# Altium PCB wisp-6-PIFA.PcbDoc
Units mil, origin at the board's own origin, x right, y up, seen from the top; angles counter-clockwise.
Board outline 2036 x 1605 mil, 4 copper layers (Top Layer, Mid-Layer 1, Mid-Layer 2, Bottom Layer); 66 components, 63 nets, 258 pads, 67 vias.
Unrouted connection lines stored in the file: 2.
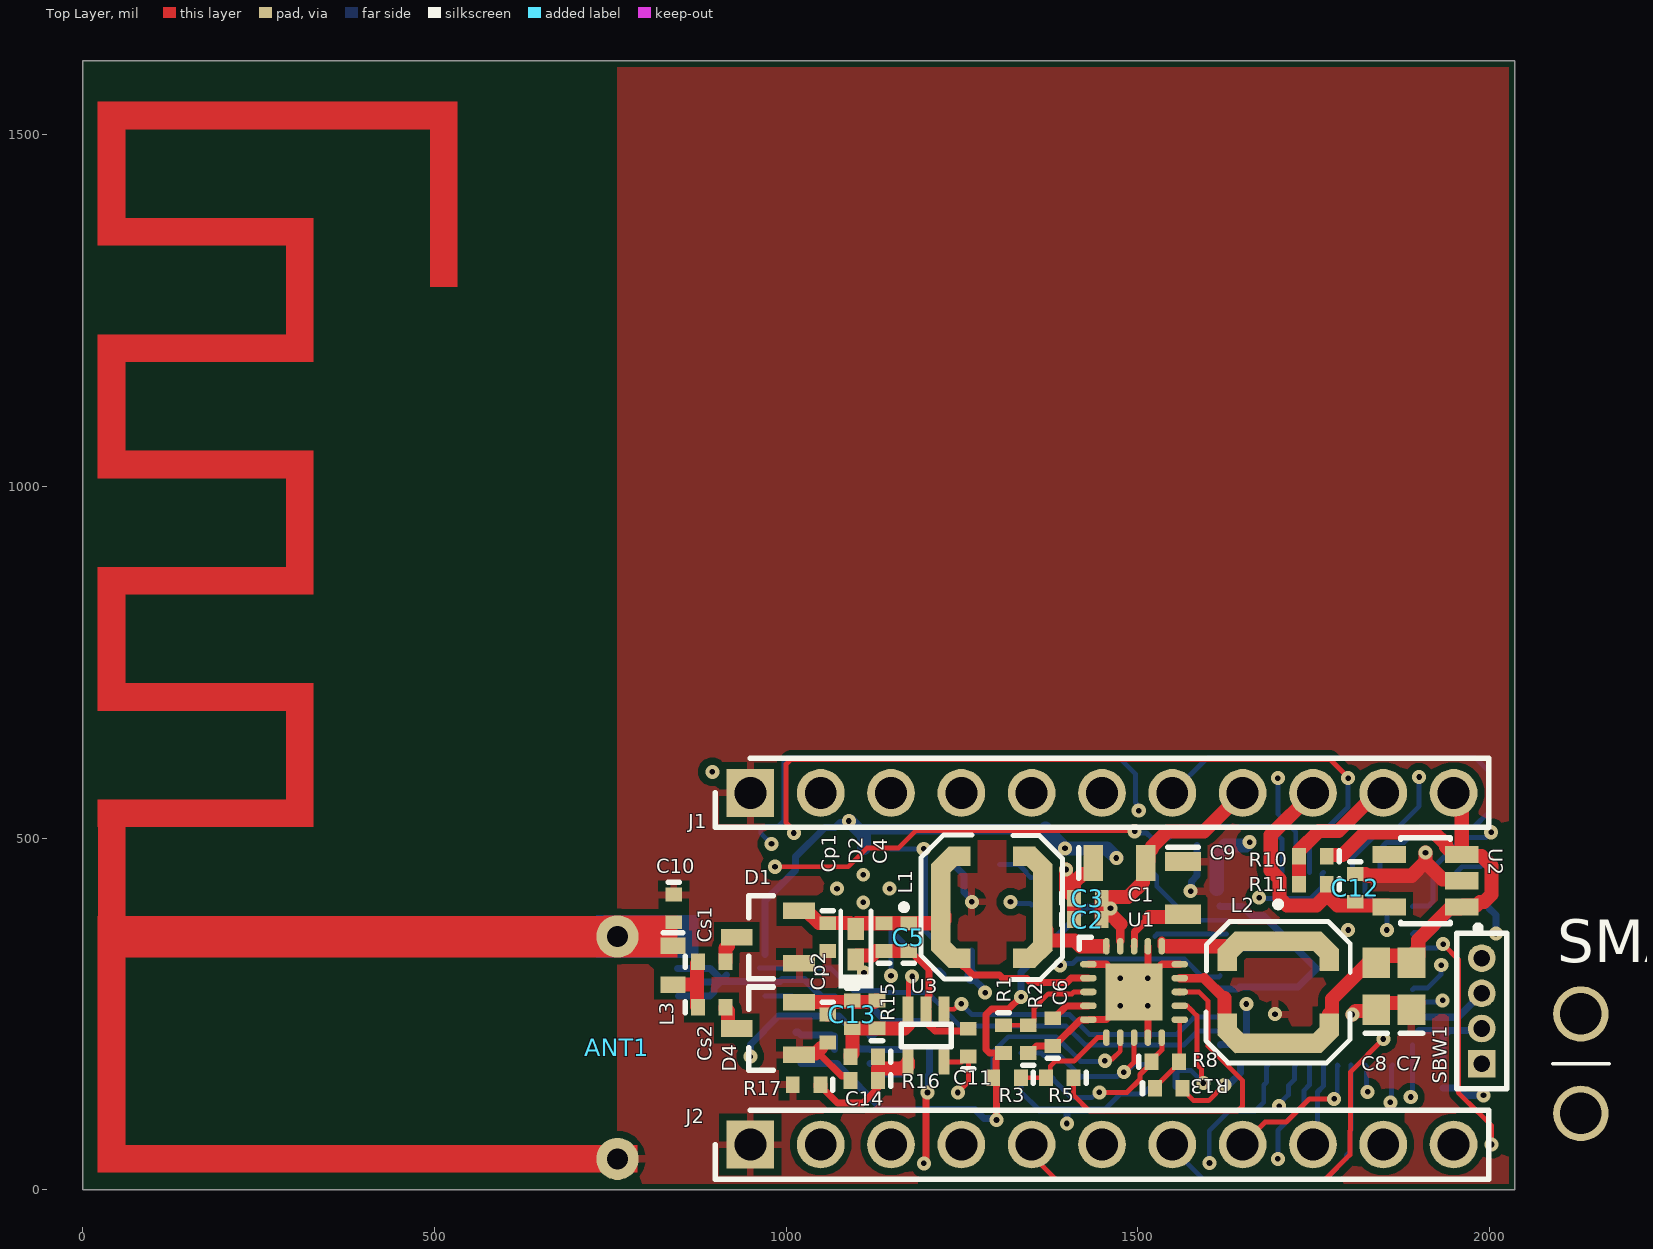
[diagram p0: Top Layer view]
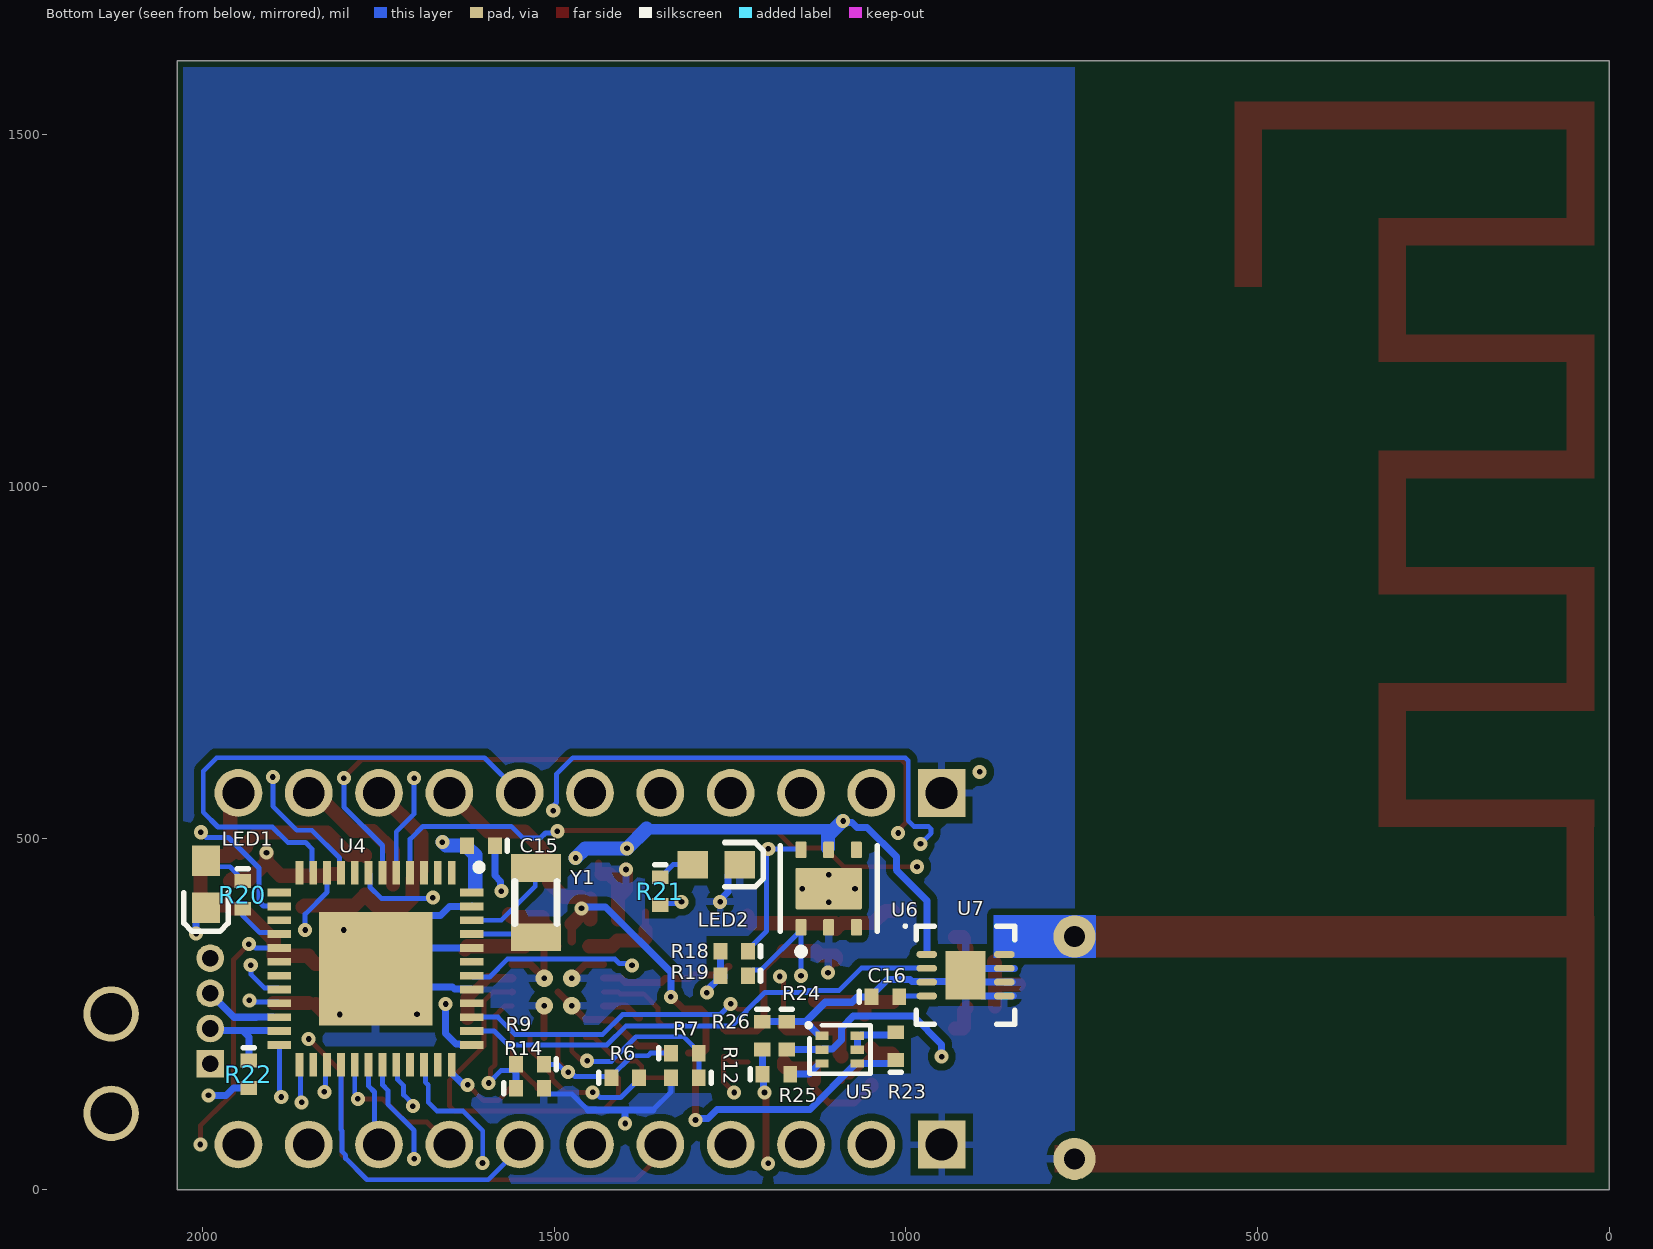
[diagram p1: Bottom Layer view, seen from below]
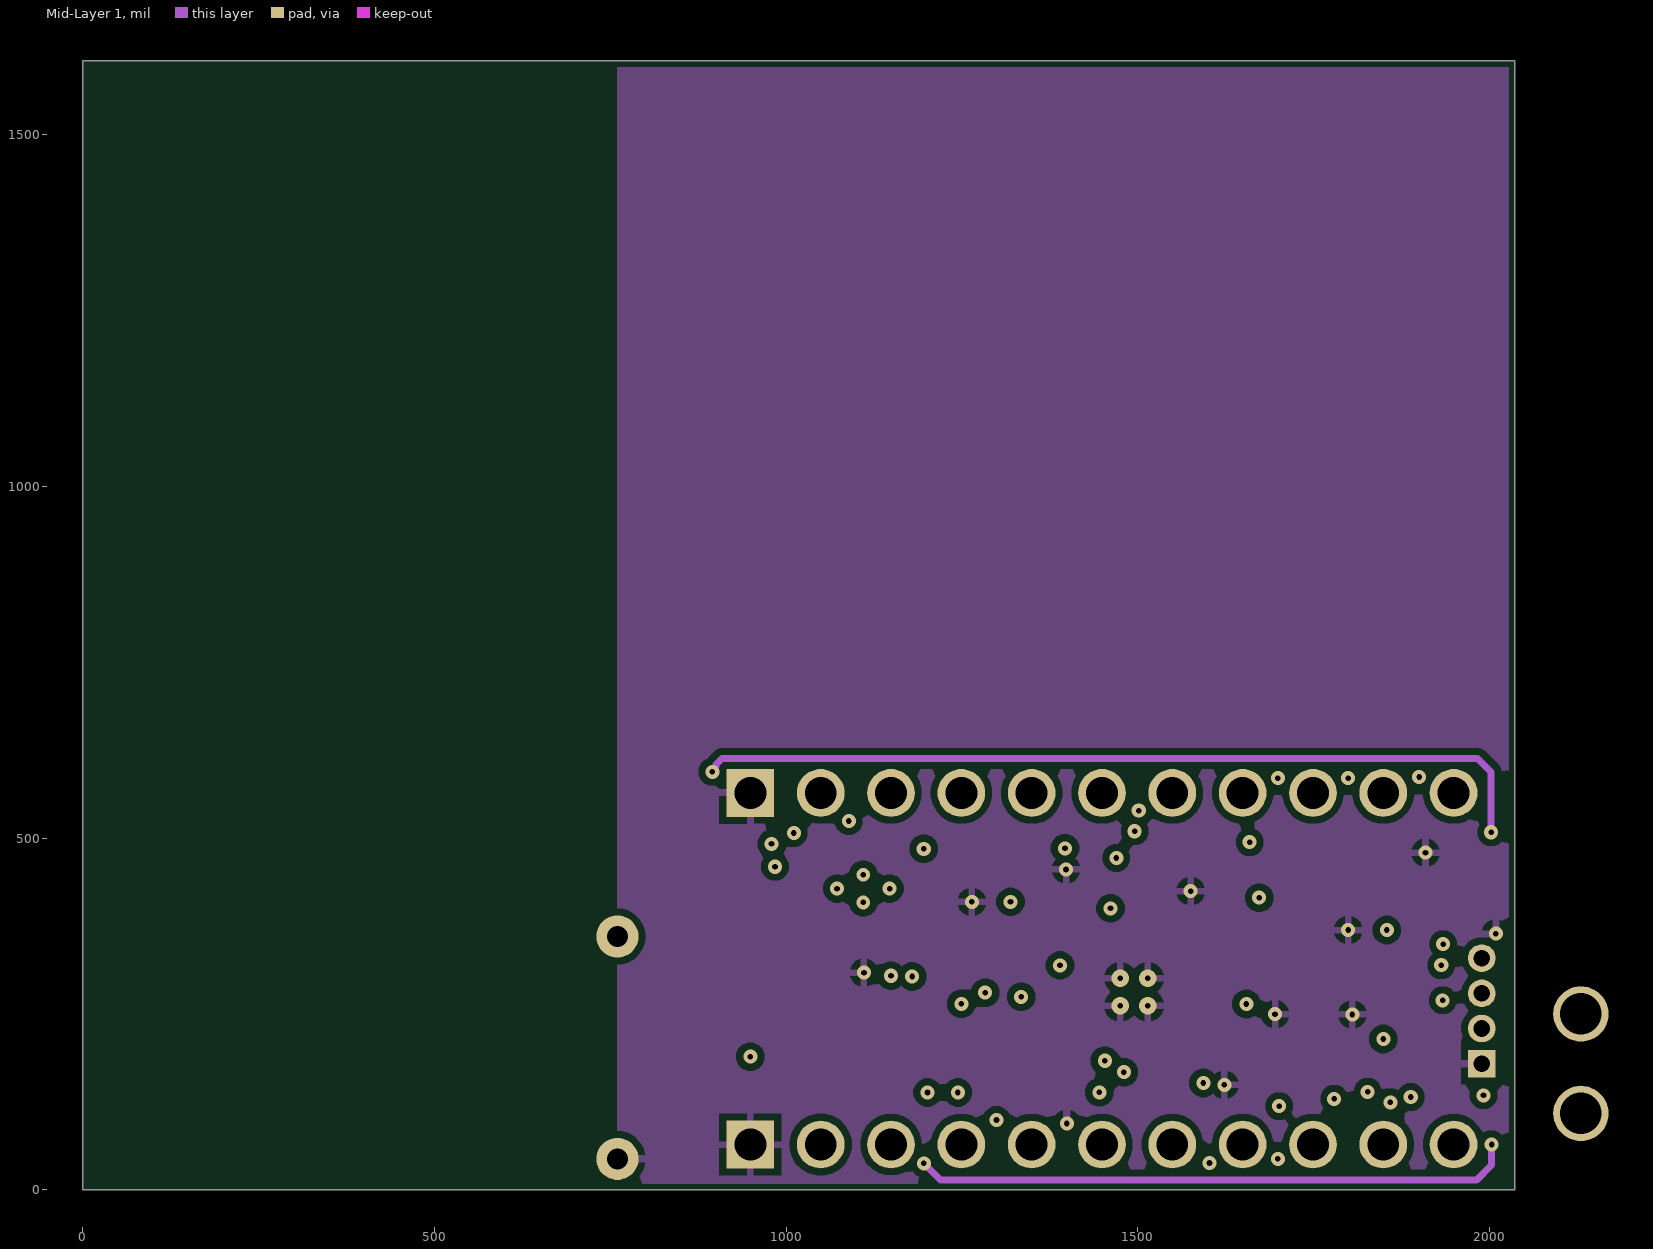
[diagram p2: Mid-Layer 1]
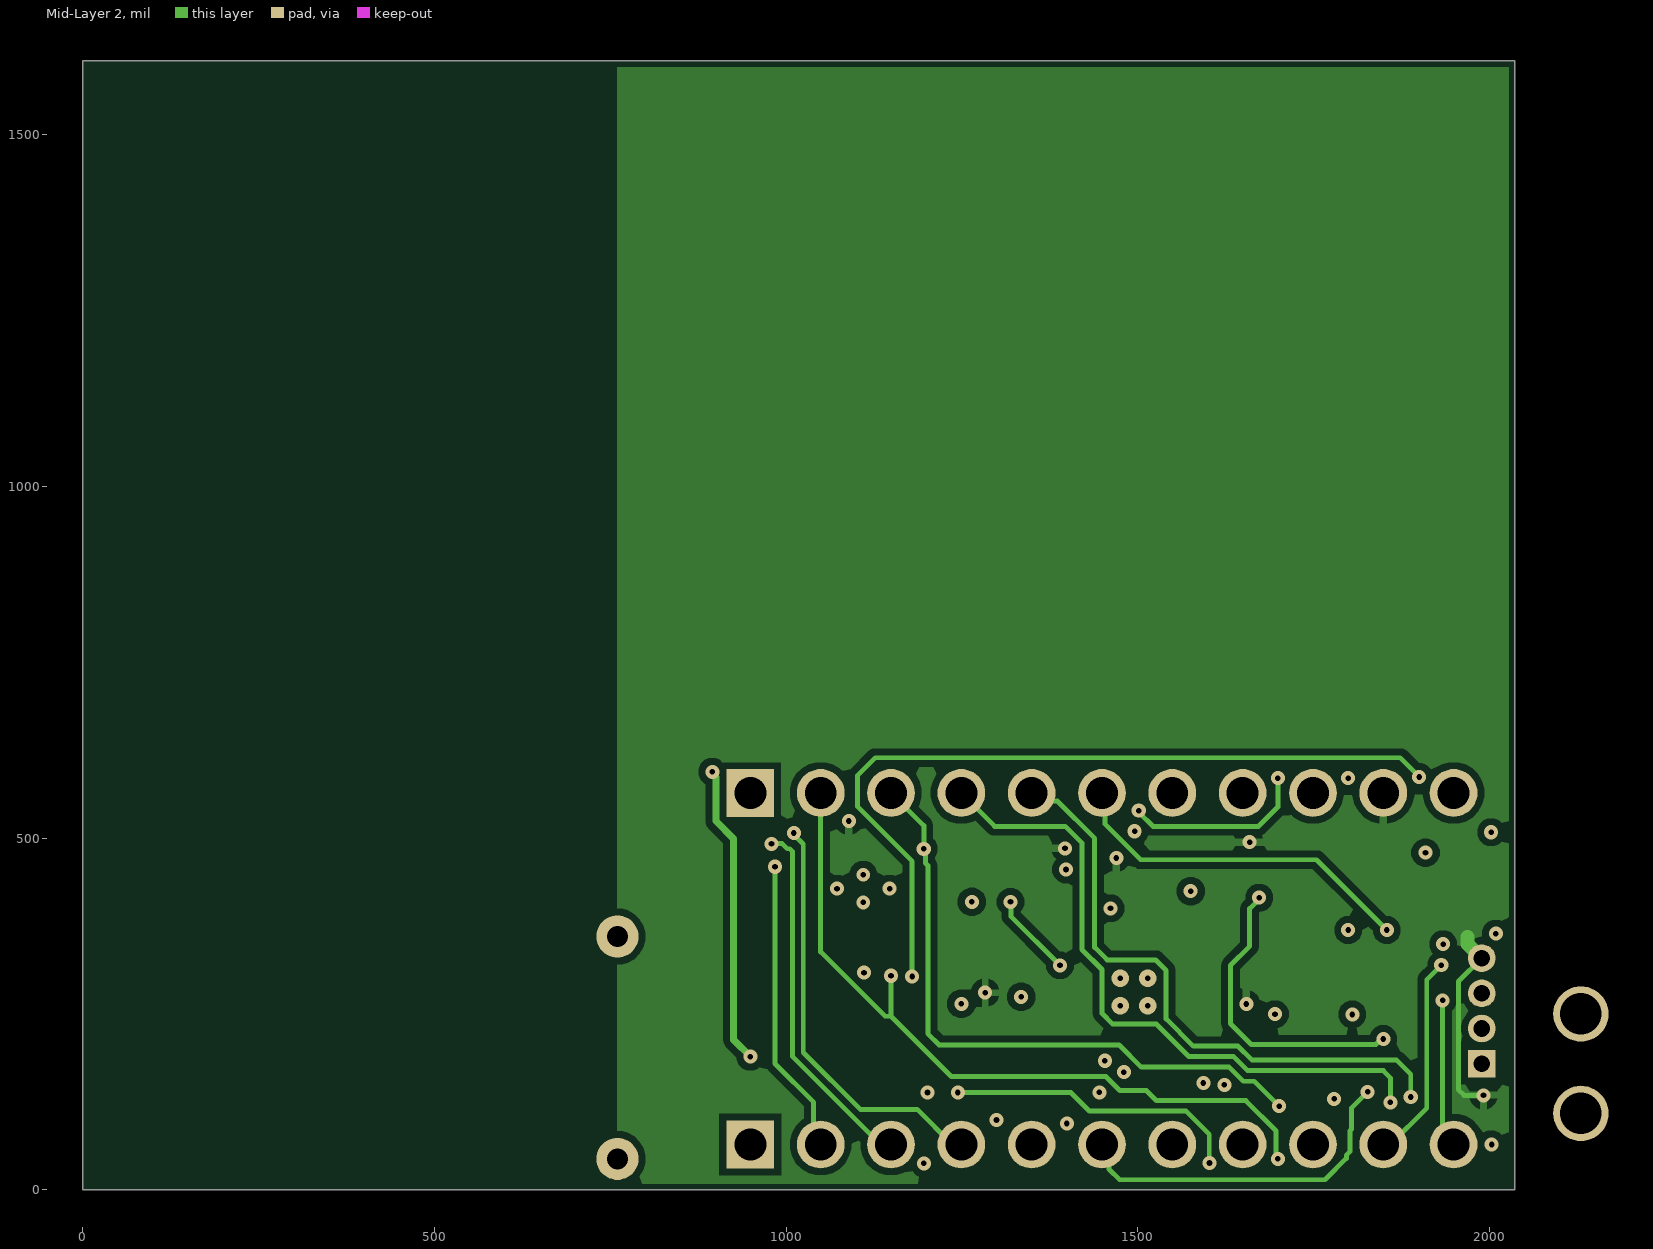
[diagram p3: Mid-Layer 2]

## Layer stack, top to bottom
Top Solder: solder mask 0.4, Solder Resist, Dk 3.5
Top Layer: signal copper 1.4
Dielectric 1: dielectric 12.6, FR-4, Dk 4.8
Mid-Layer 1: signal copper 1.4
Dielectric3: dielectric 12.6, FR-4, Dk 4.8
Mid-Layer 2: signal copper 1.4
Dielectric2: dielectric 12.6, FR-4, Dk 4.8
Bottom Layer: signal copper 1.4
Bottom Solder: solder mask 0.4, Solder Resist, Dk 3.5

## Board outline
0,0 0,1605 2036,1605 2036,0

## Design rules (kind name [scope] priority, off if disabled: settings)
BoardOutlineClearance BoardOutlineClearance_1 [(OnLayer('Bottom Overlay') AND OnLayer('Top Overlay'))] p1: gap=8.5 ignorepadtopadclearanceinfootprint=FALSE except(5: Track-OutlineEdge Track-CavityEdge Track-CutoutEdge Track-SplitBarrior Track-SplitContinuation Text-OutlineEdge Text-CavityEdge Text-CutoutEdge Text-SplitBarrior Text-SplitContinuation)
BoardOutlineClearance [Not OnLayer('Bottom Overlay') AND  Not OnLayer('Top Overlay')] p2: gap=8.5 ignorepadtopadclearanceinfootprint=FALSE except(5: Text-OutlineEdge Text-CavityEdge Text-CutoutEdge Text-SplitBarrior Text-SplitContinuation)
Clearance [All] p1: gap=10 ignorepadtopadclearanceinfootprint=FALSE except(0: Arc-Hole Track-Hole SMDPad-Hole THPad-Hole Via-Hole Fill-Hole Poly-Hole Region-Hole Text-Hole; 5: Text-Text; 6: SMDPad-SMDPad; 8: Arc-Arc Arc-Track Arc-SMDPad Track-Track Track-SMDPad; 9: Arc-Via Track-Via SMDPad-Via)
HoleSize [All] p1: absolutevalues=TRUE maxlimit=248.03 minlimit=7.87 maxpercent=80.000 minpercent=20.000
HoleToHoleClearance [All] p1: gap=19.68 allowstackedmicrovias=TRUE
MinimumSolderMaskSliver [All] p1: minsoldermaskwidth=1
PolygonConnect [All] p1: connectstyle=Relief reliefconductorwidth=10 reliefentries=4 polygonreliefangle="90 Angle" airgapwidth=10
RoomDefinition U_wisp-6-afe [InComponentClass('U_wisp-6-afe')] p1 off: confinementstyle=ConfineIn formatcopy=TRUE lockcomponents=FALSE outline 19,-3650.8 2019,-3650.8 2019,-2650.8 19,-2650.8
RoomDefinition U_wisp-6-mcu [InComponentClass('U_wisp-6-mcu')] p2 off: confinementstyle=ConfineIn formatcopy=TRUE lockcomponents=FALSE outline 19,-3650.8 2019,-3650.8 2019,-2650.8 19,-2650.8
RoomDefinition U_wisp-6-peripherals [InComponentClass('U_wisp-6-peripherals')] p3 off: confinementstyle=ConfineIn formatcopy=TRUE lockcomponents=FALSE outline 19,-3650.8 2019,-3650.8 2019,-2650.8 19,-2650.8
RoomDefinition wisp-6-main [InComponentClass('wisp-6-main')] p4 off: confinementstyle=ConfineIn formatcopy=TRUE lockcomponents=FALSE outline 19,-3650.8 2019,-3650.8 2019,-2650.8 19,-2650.8
RoutingVias [All] p1: holewidth=8 width=20 viastyle="Through Hole" minholewidth=8 minwidth=20 maxholewidth=28 maxwidth=50
SilkToSilkClearance [All] p1: silktosilkclearance=5
SilkToSolderMaskClearance [IsPad] p1: minsilkscreentomaskgap=1 clearancetoexposedcopper=TRUE
SolderMaskExpansion [All] p1: expansion=4 istentingtop=FALSE
Width [All] p1: maxlimit=20 minlimit=7 preferedwidth=10
25 further rules are at their usual default settings.

## Classes and differential pairs
component class wisp-6-main: J1 J2
component class U_wisp-6-peripherals: R23 R24 R25 R26 U5 U6
component class U_wisp-6-mcu: C15 LED1 LED2 R18 R19 R20 R21 R22 SBW1 U4 Y1
component class U_wisp-6-afe: ANT1 C1 C2 C3 C4 C5 C6 C7 C8 C9 C10 C11 C12 C13 C14 C16 Cp1 Cp2 Cs1 Cs2 D1 D2 D4 L1 L2 L3 R1 R2 R3 R5 R6 R7 R8 R9 R10 R11 R12 R13 R14 R15 R16 R17 SMA1 U1 U2 U3 U7

## Components (designator, comment, footprint, x,y, rotation, side; value= is the part's Value field where it differs from the comment)
ANT1 "Antenna" PIFA_915 760.2,358.82 r90 top
C1 "Cap" 0805 1474,464.2 r0 top value=100uF
C2 "Cap" 0402 1429,384.2 r0 top value=4.7uF
C3 "Cap" 0402 1429,414.2 r0 top value=0.1uF
C4 "Cap" 0402 1139,359.2 r90 top value=0.1uF
C5 "Cap" 0402 1174,359.2 r90 top value=4.7uF
C6 "Cap" 0402 1379,224.2 r90 top value=0.01uF
C7 "Cout1" 0603-W 1889,289.2 r90 top value=22uF
C8 "Cout2" 0603-W 1839,289.2 r90 top value=DNP
C9 "Cap" 0805 1564,429.2 r270 top value=100u
C10 "Cap" 0402 840,400 r270 top value=5.6pF
C11 "Cap" 0402 1259,209.2 r90 top value=10000pF
C12 "Cap" 0402 1809,429.2 r270 top value=1u
C13 "Cap" 0402 1094,249.2 r270 top value=33pF
C14 "Cap" 0402 1111,155.2 r180 top value=1nF
C15 "Cap" 0402 1604,489.2 r0 bottom value=4.7uF
C16 "Cap" 0402 1029,274.2 r180 bottom value=47pF
Cp1 "Cap" 0402 1059,359.2 r270 top value=33pF
Cp2 "Cap" 0402 1059,229.2 r270 top value=10pF
Cs1 "Cap" 0402 894,324.2 r0 top value=33pF
Cs2 "Cap" 0402 894,259.2 r0 top value=1pF
D1 "SMS7630-005LF" "SOT23 - N" 974,359.2 r180 top
D2 "Zener_SOD-523" Zener_SOD-523 1099,349.2 r0 top
D4 "SMS7630-005LF" "SOT23 - N" 974,229.2 r180 top
J1 "22-28-4110" 0.1_inch_11_Position 949,564.2 r0 top
J2 "22-28-4110" 0.1_inch_11_Position 949,64.2 r0 top
L1 "Ind_LPS4018" LPS4018 1284,406.2 r90 top value=22uH
L2 "Ind_LPS4018" LPS4018 1704,289.2 r0 top value=10uH
L3 "Ind" 0603 839,319.2 r270 top value=16nH
LED1 "LED" "Diode - 0603" 1995,434.2 r90 bottom
LED2 "LED" "Diode - 0603" 1269.45,462.22 r0 bottom
R1 "R_80%" 0402 1309,214.2 r270 top value=0
R2 "R_50%" 0402 1344,214.2 r90 top value=DNP
R3 "R_EN" 0402 1314,159.2 r180 top value=DNP
R5 "R_VBAT_OK" 0402 1389,159.2 r180 top value=0
R6 "Rok3" 0402 1399,159.2 r180 bottom value=1M
R7 "Rov2" 0402 1314,194.2 r180 bottom value=7.5M
R8 "Rok2" 0402 1539,182.2 r0 top value=5.52M
R9 "Rout2" 0402 1534.31,178.2 r0 bottom value=8.28M
R10 "Res" 0402 1749,474.2 r180 top value=DNP
R11 "Res" 0402 1749,434.2 r180 top value=0
R12 "Rov1" 0402 1314,159.2 r0 bottom value=5.76M
R13 "Rok1" 0402 1544,144.2 r0 top value=3M
R14 "Rout1" 0402 1534.31,144.2 r180 bottom value=4.7M
R15 "Res" 0402 1129,249.2 r90 top value=560k
R16 "Res" 0402 1111,189.2 r180 top value=22k
R17 "Res" 0402 1029,149.2 r180 top value=220k
R18 "Res" 0402 1244,339.2 r0 bottom value=100k
R19 "Res" 0402 1244,304.2 r0 bottom value=100k
R20 "Res" 0402 1943,419.2 r270 bottom value=33
R21 "Res" 0402 1349,424.51 r270 bottom value=33
R22 "Res" 0402 1934,164.2 r270 bottom value=47k
R23 "Res" 0402 1014,204.2 r90 bottom value=100k
R24 "Res" 0402 1169,219.2 r270 bottom value=47k
R25 "Res" 0402 1184,164.2 r180 bottom value=100k
R26 "Res" 0402 1204,219.2 r270 bottom value=100k
SBW1 "MHDR1X4" MHDR1X4 1989,179.2 r90 top
SMA1 "SMA - Hole - 2 Pin" "SMA - Hole - 2 Pin" 2130,179.2 r0 top
U1 "BQ25570" BQ25570 1494.63,281.2 r0 top
U2 "TPS7A0218PDBVR" SOT23-5 1909,439.2 r90 top
U3 "Comparator" SC70-5 1199,219.2 r180 top
U4 "MSP430 Wolverine 48-Pin" MSP_QFN48_RGZ_PAD0 1754,314.2 r270 bottom
U5 "SI1016X" "SC-89-6 Vishay" 1094,199.2 r180 bottom
U6 "HDC2080DMBT" FP-DMB0006A-MFG 1109.63,428.2 r90 bottom
U7 "ADG901BCPZ-500RL7" ADI-CP-8-2_L 915,305 r180 bottom
Y1 "XTAL" "XTAL [3.20mm x 1.50mm]" 1526,408.2 r90 bottom value=32.768kHz

## Footprints (in the part's own frame and the unit in brackets; to place one, negate y for a bottom-side part, rotate by r counter-clockwise, add the part's x,y. Pads: shape width x height; smd on the part's side, far side on the other; paste and mask are expansions set on the pad)
0.1_inch_11_Position [mm] "0.1 inch (2.54mm) 11 position header"
  rect 1.725x1.725 hole 1.15: 1(0,0)
  round 1.725 hole 1.15: 2(2.54,0) 3(5.08,0) 4(7.62,0) 5(10.16,0) 6(12.7,0) 7(15.24,0) 8(17.78,0) 9(20.32,0) 10(22.86,0) 11(25.4,0)
  silkscreen extent -1.27,-1.24 26.67,1.24, body extent -1.27,-1.24 26.67,1.24, height 8.38
0402 [mm] "Surface Mount; Body 1 x 0.5 mm (LxW typ)"
  rect 0.5x0.6 smd: 1(-0.5,0) 2(0.5,0)
  silkscreen extent -0.95,-0.2 -0.95,0.2, body extent -0.5,-0.25 0.5,0.25, height 0.5
0603 [mm] "Surface Mount; Body 1.6 x 0.8 mm (LxW typ)"
  rect 0.6x0.9 smd: 1(-0.7,0) 2(0.7,0)
  silkscreen extent -1.17,-0.35 -1.17,0.35, body extent -0.8,-0.4 0.8,0.4, height 0.8
0603-W [mm] "Surface Mount - Wide; Body 1.6 x 0.8 mm (LxW typ)"
  rect 1.1x1 smd: 1(-0.85,0) 2(0.85,0)
  silkscreen extent -1.7,-0.4 -1.7,0.4, body extent -0.8,-0.4 0.8,0.4, height 0.8
0805 [mm] "Surface Mount; Body 2.0 x 1.25 mm (LxW typ)"
  rect 0.7x1.3 smd: 1(-0.95,0) 2(0.95,0)
  silkscreen extent -1.48,-0.55 -1.48,0.55, body extent -1,-0.63 1,0.63, height 1.25
ADI-CP-8-2_L [mm] "SON, 8-Leads, Body 3x3mm, Pitch 0.5mm, Thermal Pad 1.75x1.45mm, IPC High Density"
  oval 0.75x0.25 smd: 1(-1.4,0.75) 2(-1.4,0.25) 3(-1.4,-0.25) 4(-1.4,-0.75) 5(1.4,-0.75) 6(1.4,-0.25) 7(1.4,0.25) 8(1.4,0.75)
  rect 1.45x1.75 smd: 9(0,0)
  silkscreen extent -2.22,-1.77 1.78,1.82, body extent -1.63,-1.62 1.63,1.63, height 0.9
BQ25570 [mm] "Boost Charger"
  oval 0.6x0.24 smd paste-0.025 mask+0.07: 1(-1.65,1) 2(-1.65,0.5) 3(-1.65,0) 4(-1.65,-0.5) 5(-1.65,-1) 11(1.65,-1) 12(1.65,-0.5) 13(1.65,0) 14(1.65,0.5) 15(1.65,1)
  oval 0.24x0.6 smd paste-0.025 mask+0.07: 6(-1,-1.65) 7(-0.5,-1.65) 8(0,-1.65) 9(0.5,-1.65) 10(1,-1.65) 16(1,1.65) 17(0.5,1.65) 18(0,1.65) 19(-0.5,1.65) 20(-1,1.65)
  rect 2.05x2.05 smd paste-1.025 mask+0.07: 21(0,0)
  silkscreen extent -1.97,1.54 -1.54,1.98, body extent -1.82,-1.82 1.83,1.83, height 1.01
"Diode - 0603" [mm] "Diode: Body 1.6 x 0.8 mm (LxW typ)"
  rect 1.1x1 smd: 1(0.85,0) 2(-0.85,0)
  silkscreen extent -1.7,-0.8 -0.3,0.8
FP-DMB0006A-MFG [mm]
  rrect25% 0.6x0.4 smd paste+0 mask+0: 1(-1.4,1) 2(-1.4,0) 3(-1.4,-1) 4(1.4,-1) 5(1.4,0) 6(1.4,1)
  rrect7% 1.5x2.4 smd paste-1000 mask+0: 7(0,0)
  silkscreen extent -2.4,-1.75 1.55,1.75, body extent -1.5,-1.5 1.5,1.5, height 0.8
LPS4018 [mil] "Inductor"
  rect 28x31.5 smd: 1(-77.03,37.61) 1(67.97,37.61) 2(-77.03,-54.39) 2(67.97,-54.39)
  rect 35.5x28 smd rot 45: 1(-68.53,55.61) 2(59.47,-72.39)
  rect 123x28 smd: 1(-4.53,64.11) 2(-4.53,-80.89)
  rect 35.5x28 smd rot 135: 1(59.47,55.61) 2(-68.03,-72.89)
  silkscreen extent -107,-109 98,120, body extent -85,-89 76,72, height 71
MHDR1X4 [mm] "Connector; Header; 4 Position"
  rect 1x1 hole 0.6: 1(0,0)
  round 1 hole 0.6: 2(1.27,0) 3(2.54,0) 4(3.81,0)
  silkscreen extent -0.9,-0.9 4.71,0.9
MSP_QFN48_RGZ_PAD0 [mm]
  rect 4.1x4.1 smd: 0(0,0)
  rect 0.85x0.28 smd: 1(-3.475,2.75) 2(-3.475,2.25) 3(-3.475,1.75) 4(-3.475,1.25) 5(-3.475,0.75) 6(-3.475,0.25) 7(-3.475,-0.25) 8(-3.475,-0.75) 9(-3.475,-1.25) 10(-3.475,-1.75) 11(-3.475,-2.25) 12(-3.475,-2.75) 25(3.475,-2.75) 26(3.475,-2.25) 27(3.475,-1.75) 28(3.475,-1.25) 29(3.475,-0.75) 30(3.475,-0.25) 31(3.475,0.25) 32(3.475,0.75) 33(3.475,1.25) 34(3.475,1.75) 35(3.475,2.25) 36(3.475,2.75)
  rect 0.28x0.85 smd: 13(-2.75,-3.475) 14(-2.25,-3.475) 15(-1.75,-3.475) 16(-1.25,-3.475) 17(-0.75,-3.475) 18(-0.25,-3.475) 19(0.25,-3.475) 20(0.75,-3.475) 21(1.25,-3.475) 22(1.75,-3.475) 23(2.25,-3.475) 24(2.75,-3.475) 37(2.75,3.475) 38(2.25,3.475) 39(1.75,3.475) 40(1.25,3.475) 41(0.75,3.475) 42(0.25,3.475) 43(-0.25,3.475) 44(-0.75,3.475) 45(-1.25,3.475) 46(-1.75,3.475) 47(-2.25,3.475) 48(-2.75,3.475)
  silkscreen extent -3.78,3.63 -3.55,3.85, body extent -3.3,-3.3 3.3,3.3, height 1
PIFA_915 [mil] "915 MHz PIFA"
  round 60 hole 30: 1(1.18,0.2) 2(-314.96,0.2)
  Top Layer region: 30.71,699.77 196.06,699.77 196.06,739.14 30.71,739.14
  Top Layer region: 196.05,739.17 156.68,739.17 156.68,471.46 196.05,471.46
  Top Layer region: 156.69,432.09 361.42,432.09 361.42,471.46 156.69,471.46
  Top Layer region: 322.04,471.46 361.41,471.46 361.41,739.17 322.04,739.17
  Top Layer region: 322.03,699.8 526.76,699.8 526.76,739.17 322.03,739.17
  Top Layer region: 487.4,471.45 526.77,471.45 526.77,739.16 487.4,739.16
  Top Layer region: 487.4,432.09 692.13,432.09 692.13,471.46 487.4,471.46
  Top Layer region: 652.75,471.46 692.12,471.46 692.12,739.17 652.75,739.17
  Top Layer region: 652.74,699.8 857.47,699.8 857.47,739.17 652.74,739.17
  Top Layer region: 818.11,471.45 857.48,471.45 857.48,739.16 818.11,739.16
  Top Layer region: 818.11,432.09 1022.83,432.09 1022.83,471.46 818.11,471.46
  Top Layer region: 983.46,471.46 1022.83,471.46 1022.83,739.17 983.46,739.17
  Top Layer region: 924.41,227.36 1148.82,227.36 1148.82,266.73 924.41,266.73
  Top Layer region: 1148.82,227.36 1188.19,227.36 1188.19,699.8 1148.82,699.8
  Top Layer region: 983.46,699.8 1188.18,699.8 1188.18,739.17 983.46,739.17
  Top Layer region: -28.35,-32.48 30.71,-32.48 30.71,699.8 -28.35,699.8
  Top Layer region: -295.28,699.8 30.71,699.8 30.71,739.17 -295.28,739.17
  Top Layer region: -334.65,-28.54 -295.28,-28.54 -295.28,739.17 -334.65,739.17
SC70-5 [mm] "SC70-5"
  rect 0.4x0.92 smd: 1(-0.65,-0.95) 2(0,-0.95) 3(0.65,-0.95) 4(0.65,0.95) 5(-0.65,0.95)
  silkscreen extent -0.9,-0.4 0.9,0.4
"SC-89-6 Vishay" [mm]
  rect 0.478x0.3 smd: 1(-0.638,0.5) 2(-0.638,0) 3(-0.638,-0.5) 4(0.638,-0.5) 5(0.638,0) 6(0.638,0.5)
  silkscreen extent -1.15,-0.87 1.11,0.91
"SMA - Hole - 2 Pin" [mm] "SMA port for wisp"
  round 2 hole 1.5: 1(0,1.796) 2(0,-1.796)
  silkscreen extent -1.02,0 1.02,0
"SOT23 - N" [mm] "SOT23, 3-Leads, Body 2.9x1.3mm, Pitch 0.95mm, Lead Span 2.3mm - Reverse Pinning, IPC Medium Density"
  rect 1.15x0.6 smd: 1(-1.125,0.95) 2(-1.125,-0.95) 3(1.125,0)
  silkscreen extent -0.2,-1.5 0.7,1.5, body extent -0.7,-1.5 0.7,1.5, height 1.1
SOT23-5 [mm] "SOT23-5"
  rect 0.62x1.22 smd: 1(-0.95,-1.31) 2(0,-1.31) 3(0.95,-1.31) 4(0.95,1.31) 5(-0.95,1.31)
  silkscreen extent -1.8,-2 1.55,0.9, body extent -1.55,-0.9 1.55,0.9, height 1
"XTAL [3.20mm x 1.50mm]" [mm] "FC-135   crystal - epson eletronics"
  rect 1x1.8 smd: 1(-1.25,0) 2(1.25,0)
  silkscreen extent -0.76,-0.76 0.76,0.76
Zener_SOD-523 [mm] "Zener Diod"
  rect 0.6x0.8 smd paste-0.05: 1(0,-0.55) 2(0,0.55)
  silkscreen extent -0.63,-1.6 0.64,1.2, body extent -0.4,-0.8 0.4,0.8, height 0.72

## Part data
C1 C2 C3 C4 C5 C6 C9 C10 C11 C12 C13 C14 C15 C16 Cp1 Cp2 Cs1 Cs2: "Ceramic Capacitor (Surface Mount)", Manufacturer="Generic Ceramic Chip Cap (TBD)"
C7 C8: library part Cap, "Ceramic Capacitor (Surface Mount)", Manufacturer="Generic Ceramic Chip Cap (TBD)", Comment_1=Cap
D1 D4: "Schottky Diodes & Rectifiers Ls=1.5nH SOT-23 Series Pair"
D2: "Diode - Zener"
J1 J2: library part 11_Pos
L1 L2: "Inductor (Surface Mount)", Manufacturer="Coil Craft"
L3: "Inductor (Surface Mount)"
LED1 LED2: library part "Diode - LED", "Typical RED, GREEN, YELLOW, AMBER GaAs LED"
R1 R2 R3 R5 R6 R7 R8 R9 R12 R13 R14: library part Res, "Chip Resistor (Surface Mount)", Manufacturer="Generic Chip Res (TBD)", Comment_1=Res
R10 R11 R15 R16 R17 R18 R19 R20 R21 R22 R23 R24 R25 R26: "Chip Resistor (Surface Mount)", Manufacturer="Generic Chip Res (TBD)"
SBW1: "Header, 4-Pin", LatestRevisionDate=17-Jul-2002, LatestRevisionNote="Re-released for DXP Platform.", Publisher="Altium Limited"
SMA1: "Two pin SMA connector wisp", Note="This part is used to attach the antennae to WISP in the layout"
U1: "Boost Charger", Digi-Key Part Number=296-37014-1-ND, Manufacturer="Texas Instruments", Manufacturer Part Number=bq25570
U2: "IC REG LINEAR 1.8V 200MA SOT23-5"
U3: library part NCS2200, "Comparator: On Semi 10uA Comparator", Digi-Key Part Number=NCS2200SQ2T2GOSTR-ND, Manufacturer="ON Semiconductor", Manufacturer Part Number=NCS2200SQ2T2G
U4: library part MSP430FR596X_586X_RGZ, "16-bit FRAM MCU", Manufacture="Texas Instrument", PartNumber=MSP430FR5969, Datasheet Link=http://www.ti.com/lit/gpn/msp430fr5969
U5: "NMOS and PMOS array"
U6: library part CMP-04948-000026-1, "HUMIDITY SENSOR", Max Operating Temperature=85°C, Min Operating Temperature=-40°C, Accuracy=2%, Interface=I2C, Mount="Surface Mount", Output Type=I2C, Packaging="Tape and Reel", Response Time=8s, Sensor Type=Temperature
U7: library part CMP-0290-00015-1, "RF Switch, Wideband, 40 dB Isolation at 1 GHz, CMOS 1.65 V to 2.75 V, SPST Switches, CP-8-2, Pb-Free, 500 Reel", Off Isolation Test Freq=1G, Supply Voltage="Single (+1.65V to +2.75V)", # Sw Functions=1, Bandwidth=4.5GHz, ComponentLink1Description="Manufacturer URL", ComponentLink1URL=www.analog.com, ComponentLink2Description=Datasheet, ComponentLink2URL=http://www.analog.com/static/imported-files/data_sheets/ADG901_902.pdf, ComponentLink3Description="Package Specification", ComponentLink3URL=http://www.analog.com/static/imported-files/packages/56953322593982CP_8_2.pdf, Configuration=SPST/NO, DatasheetVersion=RevB, Insertion Loss (dB)=800mdB, Off Isolation=37dB, P-1dB (dBm)=17, PackageDescription="8-Lead Lead Frame Chip Scale Package [LFCSP_VD]", PackageReference=CP-8-2, PackageVersion=061507-B
Y1: library part "XTAL 2-pins", "Crystal Oscillator - [3.20mm x 1.50mm]", Digi-Key Part Number="example: SE2413CT-ND", Manufacturer="Epson Toyocom Corporation", Manufacturer Part Number="FC-135 32.7680KA-A3"

## Via types
v1: diameter 20, hole 8, Top Layer to Bottom Layer, 54 vias
v2: diameter 20, hole 8, Top Layer to Bottom Layer, tented both sides, 5 vias
v3: diameter 25, hole 8, Top Layer to Bottom Layer, 4 vias
v4: diameter 19.68, hole 7.87, Top Layer to Bottom Layer, 4 vias

## Nets (pads, with @x,y where several pads share a name; then routed paths per layer and width w, separated by ;. In a path a pad name is that pad's centre, name@x,y a point inside that pad or via, vN(x,y) a via of type N, cw(c..) or ccw(c..) an arc to the next point about the centre after c; other vN are vias at no path point)
1V8: C12.2 J1.9 R11.1 U2.5 | length 354.1
  Top Layer w20: J1.9 1689,504.2 1689,454.05 1701.31,441.73 1701.31,422.6 1701.47,422.44 1701.47,414.93 1712.02,404.38 1753.72,404.38 1768.68,419.35 1768.68,417.54 1768.84,417.38 1770.65,417.38 1784.04,404 1809,404 1855.22,404 U2.5
3V3: C7.2 C8.2 J1.11 L2.2 R10.1 U1.14 U2.1 U2.3 | length 830.2
  Top Layer w12: U1.14 1594.64,300.88
  Top Layer w15: 1594.64,300.88 1622.97,272.55
  Top Layer w20: L2.2@1622.97,244.2 1622.97,272.55 ; R10.1 1768.68,475.85 1768.84,476.01 1790.81,476.01 1823,508.2 1921.01,508.2 1938,491.21 1938,487.36 U2.3@1946.56,478.8 ; L2.2@1771.97,249.81 1775.97,253.81 1775.97,271.17 1825.81,321.01 1839.31,321.01 1849,330.69 1849,332.66 C7.2@1889,332.66 ; C7.2@1898.69,334.63 C7.2@1898.69,342.35 ; C7.2@1899,332.66 C7.2@1889,332.66 ; J1.11 1960.57,552.62 U2.3 1962.78,474.39 1988.8,474.39 2002.59,460.61 2002.59,419.54 1992.05,408.99 1986.31,408.99 1981.31,404 1962.78,404 U2.1 1958.37,399.59 1943.38,399.59 1898.69,354.89 1898.69,344.31 C7.2@1898.69,342.35 ; C7.2@1889,332.66 C7.2@1898.69,342.35
ANT: ANT1.1 C10.2 L3.1 SMA1.2 U7.8
BITLINE: C13.2 R15.1 R16.2 U3.3 U4.9 | length 1498.3
  Top Layer w7: U3.3 1173.7,256.89 1173.7,295.38 1178.98,300.66 v1(1178.98,303.18)
  Top Layer w20: R16.2 1091.31,190.85 1094,193.53 C13.2 R15.1 1168.44,229.51 1173.13,234.2
  Mid-Layer 2 w7: v1(1178.98,303.18) 1179,467.08 1101.54,544.54 1101.54,589.14 1126.6,614.2 1873.09,614.2 1900.01,587.28 v1(1900.01,586.8)
  Bottom Layer w7: U4.9 1805.22,453.02 1805.22,471.84 1844.55,511.17 1865.97,511.17 1900.01,545.2 v1(1900.01,586.8)
BITLINE_LPF: C14.1 R16.1 R17.1 U3.4 | length 169.7
  Top Layer w10: R17.1@1048.68,147.54 1072.84,123.38 1109.44,123.38 C14.1@1130.68,144.63
  Top Layer w20: R17.1@1048.68,147.54 R17.1 ; C14.1 1130.68,172.2 1163.81,172.2 1165.3,173.68 1171.28,173.68 1173.41,175.81 U3.4
GND: ANT1.2 C1.1 C2.1 C3.1 C4.1 C5.1 C6.1 C7.1 C8.1 C9.1 C10.1 C11.2 C12.1 C14.2 C15.1 C16.1 Cp1.2 Cp2.2 D1.1 D2.1 D4.1 J1.1 J2.1 LED1.2 LED2.2 R2.1 R12.2 R13.2 R14.2 R17.2 R24.1 R26.1 SBW1.1 SMA1.1 U1.1 U1.5 U1.9 U1.15 U1.17 U1.21 U2.2 U3.2 U4.0 U4.36 U4.41 U4.44 U4.47 U5.1 U6.2 U7.3 U7.5 U7.6 U7.7 U7.9 | length 2756.9
  Top Layer w7: D2.1 1099,323.6 1108.03,314.58 1108.03,311.03 v1(1110.52,308.54) ; R13.2 1563.69,142.23 1579.26,126.65 1600.59,126.65 v1(1623.09,149.15)
  Top Layer w10: Cp2.2@1049.39,201.56 1049.39,191.08 1078.47,162.01 1086.47,162.01 1091.31,157.16 C14.2 ; C5.1 1175.97,339.51 1188.3,327.18 1188.92,327.18 1203,313.1 1203,275.57 1201.87,274.44 1201.87,259.47 U3.2 1201.87,253.72 1201.87,234.95 1211.33,225.49 1255.61,225.49 C11.2 ; R2.1 1345.97,194.51 1355.97,204.51 C6.1 1380.97,204.51 1418.01,241.55 1429.39,241.55 U1.5 1455.26,241.83 v3(1474.94,261.51) U1.21 ; U1.1 1455.26,320.57 v3(1474.94,300.88) ; C1.1@1432.82,448.61 1436.6,452.39 C1.1 ; U1.9 v3(1514.31,261.51) ; U1.17 v3(1514.31,300.88) 1534,320.57 U1.15 ; C8.1@1824.31,249.2 1829.2,254.08 1839,263.88 C8.1@1839,265.73
  Top Layer w20: D4.1 1020.1,193.61 1041.44,193.61 Cp2.2@1049.39,201.56 ; D2.1 1099,331.48 1100.81,333.29 1121.85,333.29 1127.92,339.35 1137.19,339.35 1137.35,339.51 C4.1 C5.1 ; v1(1397.89,455.36) 1397.89,427.28 C3.1@1409.32,415.85 ; C2.1 C3.1 C3.1@1409.32,415.85 ; C1.1@1432.82,448.61 1421.03,448.61 1409.32,436.89 C3.1@1409.32,415.85 ; v1(1804.97,249.2) 1809.85,254.08 1829.2,254.08 1829.31,254.08 1839,263.76 C8.1@1839,263.88 ; C12.1 1809.16,448.72 1823.62,448.72 1825.95,446.39 1888.9,446.39 1909,466.5 ; C8.1@1849,265.73 C7.1@1899,265.73 ; v2(1909,479.2) 1909,466.5 ; U2.2 1958.37,441.4 1933.24,441.4 1909,465.64 1909,466.5
  Bottom Layer w7: R12.2 1333.69,139.51 1359.8,113.39 ; 1452.09,113.39 1474.58,135.88 1508.29,135.88 1514.63,142.23 R14.2
  Bottom Layer w10: U7.7@845.6,314.84 891.46,314.84 906.95,299.35 906.95,296.24 970.12,296.24 991.32,296.24 994.09,299.01 1025.84,299.01 1048.68,276.16 C16.1 1069,274.2 1076.64,266.55 1114.52,266.55 1142.19,238.88 ; U7.5@846.96,275.47 886.18,275.47 886.26,275.55 891.46,275.55 897.11,281.2 897.11,286.4 904,293.29 U7.9@904,299.2 ; U7.6@847.97,295.16 905.16,295.16 U7.9 ; U5.1 1122.62,218.88 1135.12,231.38 1135.12,231.81 1142.19,238.88 ; R26.1 R24.1 1142.19,238.88 ; LED2.2 1237.96,462.22 1252.64,447.54 1252.64,423.26 1264,411.9 v1(1264,409.2) ; 1359.8,113.39 1399,113.39 ; v1(1399,94.2) 1399,113.39 ; 1452.09,113.39 1399,113.39 ; v1(1575.15,424.57) 1576.03,425.45 1576.03,438.5 1584.32,446.78 C15.1 ; U4.47@1616.68,403.29 U4.47 1648.92,402.78 1661.8,389.9 1678.29,389.9 U4.0@1724.47,343.72 ; U4.41 1617.7,285.18 1641.42,285.18 1644.35,288.11 1727.91,288.11 U4.0 U4.0@1724.47,343.72 ; U4.44 U4.0@1724.47,343.72 ; v1(1623.09,149.15) 1625,151.07 1630.63,151.07 1645.73,166.16 U4.36 ; LED1.2@1999,400.73 2009,390.73 v1(2009,364.2)
  other v1: 1695.04,249.62 1799,369.2
I2C_SCL: J1.3 R18.1 U4.32 U6.6 | length 1176
  Mid-Layer 2 w7: J1.3 1195.62,517.57 1195.62,484.81 v1(1195.55,484.74) 1198,482.29 1198,464.24 1201.5,460.74 1201.5,221.7 1217.31,205.88 1473.22,205.88 1504.9,174.2 1629.99,174.2 1649.99,154.2 1665.54,154.2 v1(1700.98,118.75)
  Bottom Layer w7: U6.6@1149,484.43 1195.24,484.43 v1(1195.55,484.74) ; v1@1198,482.82 1198,367.48 1224.32,341.16 R18.1 ; v1(1700.98,118.75) 1700.98,121.8 1713.96,134.77 1713.96,148.05 1722.46,156.55 1722.46,175.37 U4.32
I2C_SDA: J1.2 R19.1 U4.31 U6.1 | length 1401.8
  Mid-Layer 2 w7: J1.2 1049,338.23 1140.6,246.63 1149,246.63 ; v1(1149,304.2) 1149,246.63 ; v1(1699,43.91) 1696.51,46.4 1696.51,83.8 1653.66,126.65 1526.54,126.65 1512.37,140.83 1474.63,140.83 1454.58,160.88 1234.75,160.88 1149,246.63
  Bottom Layer w7: v1(1149,304.2) U6.1@1149,369.14 ; U6.1 U6.1@1149,369.14 ; R19.1 1224.32,306.16 1217.97,312.51 1205.63,312.51 U6.1@1149,369.14 ; v1(1699,43.91) 1699,84.2 1736.5,121.7 1736.5,141.43 1744.16,149.08 U4.31
LED1: R20.2 U4.16 | length 63.6
  Bottom Layer w7: U4.16 1892.82,365.42 1918.4,365.42 R20.2@1943.25,390.26
LED2: R21.2 U4.42 | length 397.7
  Mid-Layer 2 w7: v1(1318.99,409.19) 1319.5,408.69 1319.5,388.69 v1(1389.29,318.9)
  Bottom Layer w7: v1@1322.51,409.19 v1(1318.99,409.19) 1321.18,407.01 1346.82,407.01 R21.2 ; v1(1389.29,318.9) 1391.78,321.39 1406.99,321.39 1413.4,327.8 1566.46,327.8 1591.91,302.34 1615.18,302.34 U4.42
NetC6_2: C6.2 U1.4 | length 58
  Top Layer w10: C6.2 1380.97,243.88 1398.6,261.51 U1.4
NetC9_2: C9.2 U1.18 | length 99.8
  Top Layer w10: U1.18 1494.91,346.43 1494.91,366.16 1516.76,388.01
  Top Layer w20: 1516.76,388.01 1560.22,388.01 C9.2
NetC11_1: C11.1 U3.5 U4.34 | length 714.1
  Top Layer w7: U3.5 1249.31,181.79 1257.03,189.51 C11.1 1259,153.2 v1(1244,138.2)
  Mid-Layer 2 w7: v1(1244,138.2) 1404.67,138.2 1431.21,111.65 1568.66,111.65 1601.54,78.77 1601.54,38.28 v1(1601.83,37.99)
  Bottom Layer w7: v1(1601.83,37.99) 1601.54,38.28 1601.54,83.85 1629.34,111.65 1666.46,111.65 1679,124.2 1679,148.93 1683.09,153.02 1683.09,175.37 U4.34
NetC13_1: C13.1 Cp2.1 D4.2 R15.2 | length 129.4
  Top Layer w20: D4.2 1059,266.6 ; Cp2.1 1059,266.6 ; R15.2 1127.35,268.88 1125.06,266.6 1059,266.6
NetC16_2: C16.2 U7.4 | length 39.7
  Bottom Layer w7: U7.4 1008.04,275.47 C16.2
NetCs1_1: Cs1.1 Cs2.1 L3.2 | length 104.6
  Top Layer w10: 866,286.64 871.56,292.2 872.94,290.82 ; Cs2.1@872.94,260.57 Cs2.1
  Top Layer w20: L3.2 871,291.64 ; Cs2.1@872.94,260.57 872.94,290.82 ; 873.37,294.01 873.37,321.6 874.32,322.54 Cs1.1
NetCs1_2: Cs1.2 D1.3 | length 48
  Top Layer w20: Cs1.2 913.84,324.35 913.84,343.33 917.07,346.56 917.07,357.38 918.88,359.2 D1.3
NetCs2_2: Cs2.2 D4.3 | length 43
  Top Layer w20: Cs2.2 913.69,257.54 917.07,254.16 917.07,231.01 918.88,229.2 D4.3
NetL1_2: L1.2 U1.20 | length 125.9
  Top Layer w10: L1.2@1369.89,369.48 L1.2@1369.89,394.67 ; U1.20@1450.96,346.16 U1.20
  Top Layer w20: L1.2@1369.89,369.48 1369.89,358.2 1373.89,354.2 1410.18,354.2 1418.22,346.16 1449.98,346.16
NetL2_1: L2.1 U1.16 | length 95
  Top Layer w12: U1.16 U1.16@1534,354.2
  Top Layer w20: 1542.04,346.16 1622.97,346.16 1626.97,342.16 L2.1@1626.97,341.81
NetLED1_1: LED1.1 R20.1 | length 50.5
  Bottom Layer w7: R20.1@1944,442.23 1960.97,459.2 LED1.1@1987.46,459.2
NetLED2_1: LED2.1 R21.1 | length 54.7
  Bottom Layer w7: LED2.1 1330.98,462.22 1340.69,452.51 1340.69,450.54 1347.03,444.2 R21.1
NetR1_1: R1.1 R2.2 U1.3 | length 150.8
  Top Layer w7: R1.1 R2.2 1345.97,233.88 1352.31,240.22 1352.31,258.17 1372.55,278.4 1406.07,278.4 1408.86,281.2 U1.3
NetR3_1: R3.1 R5.2 U1.6 | length 151.2
  Top Layer w7: R3.1 R5.2 1375.41,165.29 1375.41,175.6 1382.56,182.76 1409.18,182.76 1442.66,216.24 U1.6
NetR5_1: R5.1 U1.13 | length 492.9
  Top Layer w7: R5.1 1408.68,134.18 1431.21,111.65 1641.46,111.65 1649,119.2 1649,155.06 1599.97,204.09 1599.97,268.22 1587.28,280.92 U1.13@1559.87,280.92
  Top Layer w10: U1.13 U1.13@1559.87,280.92
NetR6_1: R6.1 R7.1 R9.1 U1.8 | length 259.6
  Top Layer w7: v2@1480.14,167.15 1494.63,181.64 U1.8
  Bottom Layer w7: R7.1 1362.77,194.2 1366.46,190.51 1389.34,190.51 1418.68,161.16 R6.1 1420.37,160.88 1470.36,160.88 1476.62,167.14 1483.66,167.14 1494.78,178.27 R9.1@1514.63,178.27
  other v2: 1480.14,167.14
NetR6_2: R6.2 R8.1 U1.10 | length 218.1
  Top Layer w7: v2(1445.26,138.38) 1484.61,138.38 1502.97,156.74 1502.97,163.77 1512.97,173.77 1512.97,175.85 R8.1 ; R8.1@1519.17,184.02 1529.08,193.92 1529.36,193.92 1534.16,198.72 1534.16,216.08 U1.10
  Bottom Layer w7: R6.2 1379.31,157.23 1405.66,130.88 1434.24,130.88 1441.74,138.38 v2(1445.26,138.38)
NetR7_2: R7.2 R12.1 U1.7 | length 266.2
  Top Layer w7: v2(1453,183.38) 1455.48,185.87 1463.81,185.87 1474.94,197.01 U1.7
  Bottom Layer w7: R12.1 R7.2 1294.31,196.16 1315.66,217.51 1383.56,217.51 1418.56,182.51 1452.12,182.51 v2(1453,183.38)
NetR8_2: R8.2 R13.1 U1.11 | length 115.4
  Top Layer w7: R13.1 1524.32,146.16 1530.66,152.51 1530.96,152.51 1558.69,180.23 R8.2 ; R8.2@1558.69,179.2 1559.59,180.1 U1.11
NetR9_2: R9.2 R14.1 U1.12 | length 195.8
  Top Layer w7: U1.12 1560.06,261.04 1570.41,261.04 1573.4,258.05 1584,247.45 1584,177.71 1590.7,171.01 1590.7,154.18 v1(1593.19,151.7)
  Bottom Layer w7: 1554,164.2 1559,169.2 1575.69,169.2 v1(1593.19,151.7)
  Bottom Layer w10: R14.1@1554,146.7 1554,164.2
NetR23_2: R23.2 U5.5 U5.6 | length 76.6
  Bottom Layer w10: R23.2 1016.72,223.88 1020.81,219.79 1064.47,219.79 1065.38,218.88 U5.6 U5.5
NetR24_2: R24.2 U4.14 U5.2 | length 2106
  Mid-Layer 1 w10: v1(895.04,594.2) 895.04,596.9 900.04,601.9 900.04,604.37 908.83,613.15 1983.07,613.15 2002.32,593.9 v1(2002.32,508.31)
  Mid-Layer 2 w10: v1(895.04,594.2) 895.04,591.49 900.04,586.49 900.04,524.03 925,499.07 925,213.2 v1(949,189.2)
  Bottom Layer w7: U4.14 1891.52,403.48 1913.2,403.48 1919.69,409.98 1919.69,457.49 1963.02,500.81 1994.82,500.81 v1(2002.32,508.31)
  Bottom Layer w10: v1(949,189.2) 949,206.55 989.17,246.72 1074.74,246.72 1091.66,229.8 1091.66,212.64 1104.32,199.98 1118.34,199.98 U5.2 1119.28,199.35 1168.84,199.35 R24.2
NetR25_1: R25.1 R26.2 U4.17 | length 1379.3
  Top Layer w7: v1(1934,349.2) 1955.81,327.38 1955.81,138.06 1983.64,110.24 1983.86,110.24 2002.96,91.14 v1(2002.96,64.2)
  Top Layer w10: v1(1195.82,37.38) 1195.82,40.08 1199,43.26 1199,136.28 v1(1200.91,138.2)
  Mid-Layer 1 w10: v1(1195.82,37.38) 1219.2,13.99 1981.82,13.99 2002.96,35.13 v1(2002.96,64.2)
  Bottom Layer w7: U4.17 1925.01,343.72 1930.48,349.2 v1(1934,349.2)
  Bottom Layer w10: v1(1200.91,138.2) 1202.3,139.58 1202.3,162.81 R25.1 1203.68,199.2 R26.2
NetR25_2: R25.2 U5.3 | length 51.5
  Bottom Layer w10: U5.3 1122.62,179.51 1137.94,164.2 R25.2
NetU4_38: U4.38 U7.2 | length 709.7
  Bottom Layer w7: U7.2@961.71,315.51 965.59,315.51 965.71,315.39 982.51,315.39 982.63,315.51 1062.69,315.51 1095.14,283.05 1138.32,283.05 1140.7,280.68 1200.12,280.68 1227.31,253.49 1227.31,252.65 1247.46,232.51 1301.1,232.51 1398.18,232.51 1424.8,205.88 1565.69,205.88 1585.42,225.61 U4.38
NetU4_45: U4.45 Y1.1 | length 103.2
  Bottom Layer w7: Y1.1@1524,359.98 1527.43,363.41 U4.45@1625.77,363.41
NetU4_46: U4.46 Y1.2 | length 144.2
  Bottom Layer w7: Y1.2@1519,453.41 1526.87,445.54 1526.87,431.32 1575.1,383.09 U4.46@1625.77,383.09
P1.0: U4.1
P1.1: U4.2
P1.2: U4.3
P3.0: J2.2 U4.4 | length 1232.3
  Top Layer w7: v1(984,459.2) 1088.23,459.2 1115.01,485.98 1159.76,485.98 1184.3,510.51 1494.5,510.51 v1(1495.34,509.67)
  Mid-Layer 2 w7: v1(984,459.2) 984,179.2 1039,124.2 1039,74.2 J2.2
  Bottom Layer w7: v1(984,459.2) v1@984,459.62 ; J2.2@1047.27,64.39 1048.81,64.39 J2.2 ; v1(1495.34,509.67) 1497.83,507.18 1512.36,507.18 1519.34,500.2 1544.4,500.2 1560.94,516.74 1686.46,516.74 1704.79,498.41 U4.4
P3.1: J2.3 U4.5 | length 1639.2
  Mid-Layer 2 w7: v1(979,491.7) 979.34,492.04 994.34,492.04 1001.59,484.78 1005.06,484.78 1009.16,480.68 1009.16,189.03 1119.22,78.97 1119.39,78.97 1134.17,64.2 J2.3 ; v1(1501.24,539.08) 1501.24,536.95 1521.46,516.74 1671.54,516.74 1699,544.2 v1(1699,585.2)
  Bottom Layer w7: v1(979,491.7) 963.86,506.84 963.86,512.64 967.96,516.74 988.55,516.74 996.46,524.65 996.46,610.1 1000.56,614.2 1473.5,614.2 1496.46,591.24 1496.46,550.65 1498.76,548.35 1498.76,541.57 v1(1501.24,539.08) ; v1(1699,585.2) 1699,534.46 1724.47,508.98 U4.5
P3.2: J2.4 U4.6 | length 1669.2
  Top Layer w7: v1(1010.91,507.28) 1010.91,510.8 999.9,521.81 999.9,605.1 1006.46,611.65 1773.43,611.65 1799,586.08 v1(1799,585.2)
  Mid-Layer 2 w7: v1(1010.91,507.28) 1010.91,504.8 1024.16,491.54 1024.16,463.56 1024.26,463.47 1024.26,195.15 1105.21,114.2 1186.31,114.2 1236.31,64.2 J2.4
  Bottom Layer w7: U4.6 1744.16,489.35 1799,544.2 v1(1799,585.2)
P3.3: J2.5 U4.7 | length 1227.7
  Top Layer w7: J2.5 1349,49.36 1384.17,14.2 1766.11,14.2 1801.54,49.63 1801.54,83.85 1802.5,84.81 1802.5,167.7 v1(1849,214.2)
  Mid-Layer 2 w7: v1(1672.47,415.27) 1672.47,413.23 1659,399.76 1659,346.34 1631.79,319.13 1631.79,236.03 1661.31,206.51 1838.4,206.51 1846.09,214.2 v1(1849,214.2)
  Bottom Layer w7: v1(1672.47,415.27) 1673.55,414.2 1745.85,414.2 1761.83,430.17 1761.83,448.99 U4.7
P3.4: J2.6 U4.27 | length 542.3
  Mid-Layer 2 w7: J2.6 1458.78,54.42 1458.78,29.42 1474,14.2 1766.11,14.2 1796.46,44.54 1796.46,48.85 1801.54,53.94 1801.54,83.85 1804,86.31 1804,116.48 v1(1826.71,139.2)
  Bottom Layer w7: U4.27 1824.91,175.37 1824.91,141 v1(1826.71,139.2)
P3.5: J2.7 U4.28 | length 419.4
  Bottom Layer w7: J2.7 1549,59.01 1593.81,14.2 1766.11,14.2 1796.46,44.54 1796.46,48.85 1801.54,53.94 1801.54,83.85 1803.21,85.52 U4.28
P3.6: J2.8 U4.29 | length 208.1
  Top Layer w7: J2.8 1681.06,96.25 1711.06,96.25 1744,129.2 v1(1779,129.2)
  Bottom Layer w7: v1(1779,129.2) 1779,132.71 1783.53,137.24 1783.53,174.79 1784.83,176.09 U4.29
P3.7: J2.9 U4.30 | length 119.3
  Bottom Layer w7: J2.9 1755.5,70.7 1755.5,138.93 1763.84,147.27 U4.30
P4.7: U4.8
PJ.0: U4.12
PJ.1: U4.13
RST: R22.1 SBW1.2 U4.23 | length 137
  Bottom Layer w10: U4.23@1899.39,225.61 1899.9,226.13 1942.92,226.13 ; R22.1 1934,217.21 1942.92,226.13 ; SBW1.2 1985.93,226.13 1942.92,226.13
RX: U3.1 U4.39 | length 423.8
  Top Layer w7: U3.1 1238.89,256.6 1246.49,264.2 v1(1249,264.2)
  Bottom Layer w7: v1(1249,264.2) 1264,249.2 1402.7,249.2 1431.01,220.88 1555.69,220.88 1580.1,245.3 U4.39
SPI_CS: J1.6 U4.10 | length 618.5
  Mid-Layer 2 w7: J1.6@1438.64,553.84 J1.6 1453.45,559.74 1453.45,519.74 1504,469.2 1754,469.2 v1(1854,369.2)
  Bottom Layer w7: U4.10 1822.9,422.98 1854,391.88 v1(1854,369.2)
SPI_SCK: J1.7 U4.11 | length 747.5
  Bottom Layer w7: J1.7 1599,614.2 1979.9,614.2 1999,595.1 1999,536.81 1978,515.81 1900.62,515.81 1878.63,493.83 1853.63,493.83 1844.59,484.79 1844.59,453.02 U4.11
SPI_SDI: J1.4 U4.25 | length 992.5
  Mid-Layer 2 w7: J1.4 1296.46,516.74 1396.75,516.74 1420.39,493.11 1420.39,341.6 1448.94,313.04 1448.94,250.74 1464.18,235.51 1526.47,235.51 1572.79,189.2 1636.2,189.2 1656.2,169.2 1849,169.2 1859,159.2 v1(1859,124.2)
  Bottom Layer w7: v1(1859,124.2) 1860.63,125.83 1860.63,175.75 U4.25
SPI_SDO: J1.5 U4.24 | length 943.6
  Mid-Layer 2 w7: J1.5 1360.66,552.54 1385.66,552.54 1438.64,499.55 1438.64,344.55 1456.32,326.88 1525.08,326.88 1540.31,311.65 1540.31,242.88 1579,204.2 1642.41,204.2 1662.41,184.2 1868.03,184.2 1888.03,164.2 v1(1888.03,131.75)
  Bottom Layer w7: v1(1888.03,131.75) 1888.03,135.27 1890.81,138.04 U4.24
TEST: SBW1.3 U4.22 | length 103.7
  Bottom Layer w10: U4.22@1899.39,245.3 1923.19,245.3 1923.29,245.2 1955,245.2 SBW1.3
UART_RX: J2.11 U4.21 | length 255.7
  Mid-Layer 2 w7: v1(1933.31,269.2) 1933.31,79.88 J2.11
  Bottom Layer w7: U4.21 1892.82,267 1931.11,267 v1(1933.31,269.2)
UART_TX: J2.10 U4.20 | length 357.6
  Mid-Layer 2 w7: J2.10 1859,64.2 1910.81,116.01 1910.81,298.72 v1(1931.4,319.31)
  Bottom Layer w7: U4.20 1892.82,286.68 1911.64,286.68 1930.83,305.86 1930.83,318.74 v1(1931.4,319.31)
VBOOST: C1.2 C2.2 C3.2 J1.8 R1.2 R3.2 R23.1 U1.19 U5.4 | length 1095.2
  Top Layer w10: R1.2@1298.53,186.01 1298.53,163.41 R3.2 1299,154.51 v1(1299,99.2) ; R1.2 1289,194.51 1284.19,199.32 1284.19,249.11 1291.8,256.72 1316.12,256.72 1333.59,274.2 v1(1334,274.2)
  Top Layer w12: U1.19@1474.92,352.97 1474.92,377.96
  Top Layer w20: C2.2 C3.2 ; v1@1461.14,391.74 1474.92,377.96 ; 1461.14,416.01 1485.81,416.01 1507.62,437.82 1507.62,460.42 1515.18,467.98 1515.18,479.79 1520.41,485.01 1520.41,487.83 1541.77,509.2 1594,509.2 J1.8
  Bottom Layer w7: R23.1 1015.97,184.51 R23.1@1020.81,179.67
  Bottom Layer w10: R23.1@1020.81,179.67 1026.51,179.67 1026.67,179.51 1072.39,179.51 1073.29,178.61 1073.29,177.36 1136.46,114.2 1268.24,114.2 1281.32,101.11 1297.09,101.11 v1(1299,99.2) ; v1(1334,274.2) 1334,309.2 1426.74,401.94 1459.23,401.94 v1(1461.14,400.02)
Vrect: C4.2 C5.2 Cp1.1 D1.2 D2.2 L1.1 U1.2 | length 420
  Top Layer w10: L1.1@1251.39,317.17 1253.14,317.17 1265.2,305.1 1303.09,305.1 1308.19,300 1342.13,300 1347.23,294.9 1399.23,294.9 1405.21,300.88 U1.2
  Top Layer w20: D1.2 1029.12,396.6 1046.68,379.04 1059,379.04 1090.81,379.04 1093.26,376.59 1097.19,376.59 1099,374.78 D2.2 ; D2.2@1099,375.85 1099,377.07 1100.81,378.88 C4.2 C5.2 1220.89,378.88 1224.89,382.88 L1.1@1224.89,389.67
VREG: C15.2 J1.10 R10.2 R11.2 R18.2 R19.2 R22.2 SBW1.4 U4.37 U4.48 U6.5 U7.1 | length 1481.4
  Top Layer w20: R11.2 R10.2 1729.31,481.94 1757.62,510.24 1785.45,510.24 1839.4,564.2 J1.10
  Mid-Layer 2 w7: SBW1.4 1955.81,296.01 1955.81,142.38 1964,134.2 v1(1991.5,134.2)
  Mid-Layer 2 w20: 1969,359.2 1969,349.2 SBW1.4
  Bottom Layer w10: U7.1 970.12,411.37 1013.52,454.77 1013.52,473.71 1055.04,515.24 1069.28,515.24 1076.32,522.28 1087.09,522.28 v1(1089,524.2) ; R19.2@1263.69,302.54 v1@1282.95,283.28 ; R19.2 R18.2 ; U4.37 1617.7,206.44 1634.16,206.44 1634.84,207.12 1639.32,207.12 1654.29,222.09 v1(1654.29,264.11) ; R22.2 1934.16,144.35 1956.19,144.35 1966.35,134.2 v1(1991.5,134.2)
  Bottom Layer w15: 1100.37,513.89 1101.52,512.74 1367.83,512.74 1368.38,513.29
  Bottom Layer w20: v1(1089,524.2) 1090.07,524.2 1100.37,513.89 ; 1101.52,512.74 1110.68,503.59 U6.5@1110.68,486 ; R19.2@1263.69,302.54 R19.2 ; 1368.38,513.29 v1(1396.36,485.32) 1455.78,485.32 v1(1469.38,471.72) ; U4.48@1612.16,427.5 1612.16,476.01 1623.69,487.54 C15.2 1653.96,489.2 v2(1659,494.24)
  other v1: 1282.95,280.1
pads on no net: U2.4 U4.15 U4.18 U4.19 U4.26 U4.33 U4.35 U4.40 U4.43 U6.3 U6.4 U6.7
copper on no net:
  other v4: 1109.63,408.51 1072.23,428.2 1147.03,428.2 1109.63,447.88

## Polygon pours and split planes (outlines as drawn)
GND on Top Layer "GND_L-01_P-001" (solid, remove dead copper, pour order 0): 935.48,0.18 935.29,0 760,0 760,1605 2035,1605 2035,0.05 935.48,0.05
GND on Mid-Layer 1 "GND_L-01_P-001" (solid, remove dead copper, pour order 5): 935.48,0.14 935.29,-0.05 760,-0.05 760,1604.95 2035,1604.95 2035,0 935.48,0
GND on Bottom Layer "GND_L-01_P-001" (solid, remove dead copper, pour order 6): 935.48,0.14 935.29,-0.05 760,-0.05 760,1604.95 2035,1604.95 2035,0 935.48,0
VREG on Mid-Layer 2 "GND_L-01_P-001" (solid, remove dead copper, pour order 7): 935.48,0.14 935.29,-0.05 760,-0.05 760,1604.95 2035,1604.95 2035,0 935.48,0

## Other copper
Top Layer:
  region net ANT: 740.18,389.53 845.18,389.53 845.18,330.47 740.18,330.47
Bottom Layer:
  region net ANT: 730,390 875,390 875,330 730,330

## Silkscreen, mask and mechanical layers (free items; w line width, h text height)
Mechanical 1:
  the board outline again, w10
Mechanical 3:
  lines w10: 4204,-475.81 6474,-475.81 6474,1164.19 4204,1164.19 4204,-475.81